# Altium PCB Z693_H93-B_KD01_V1.3.PcbDoc
Units mil, origin at the board's own origin, x right, y up, seen from the top; angles counter-clockwise.
Board outline 1912 x 1847.55 mil, 4 copper layers (Top Layer, MidLayer1, MidLayer2, Bottom Layer); 3 components, 103 nets, 2 pads, 4 vias.
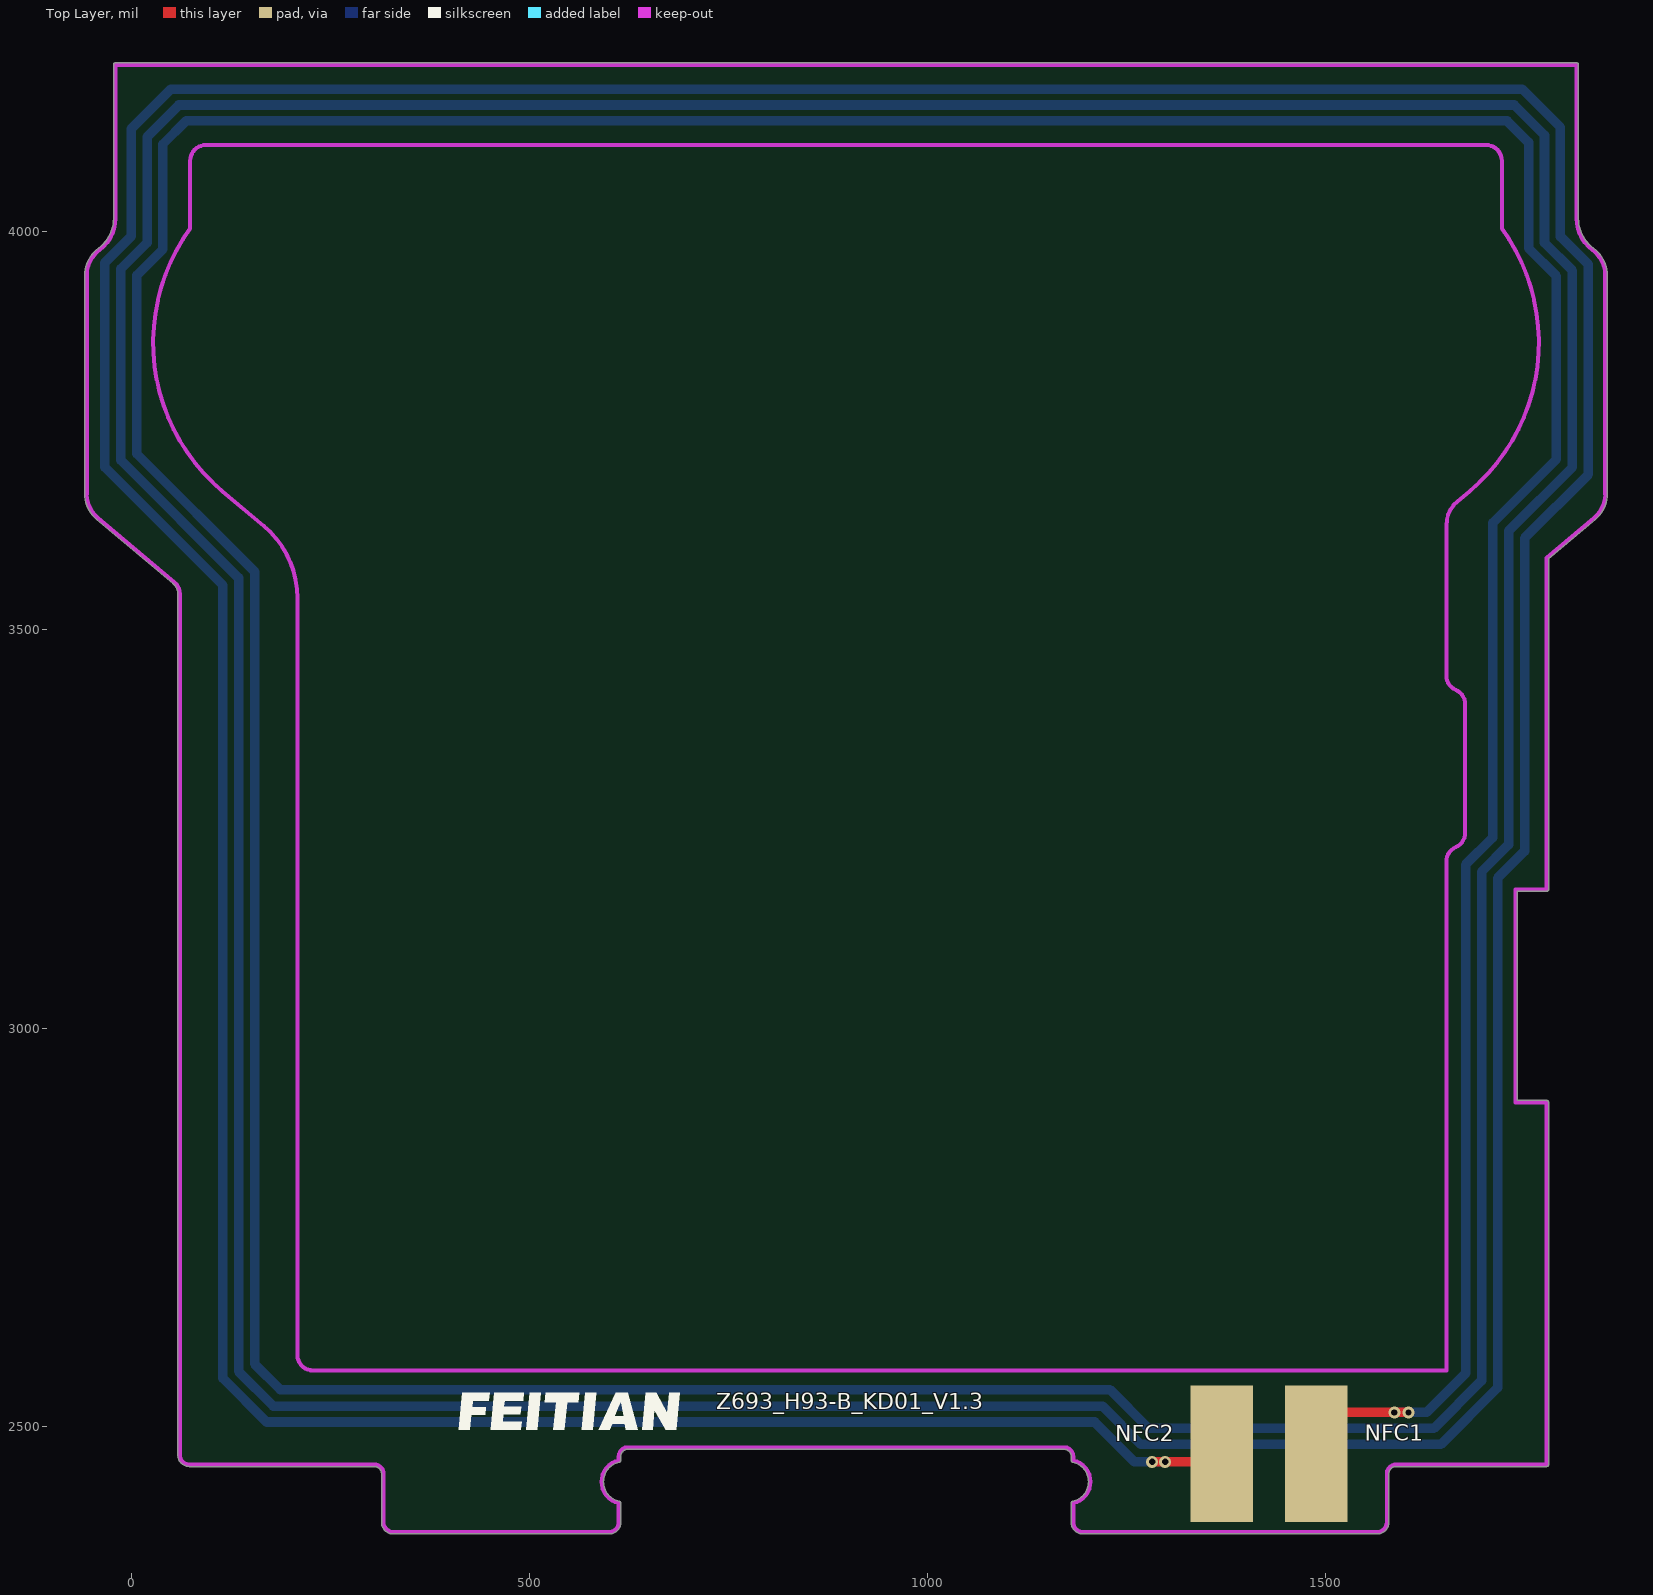
[diagram p0: Top Layer view]
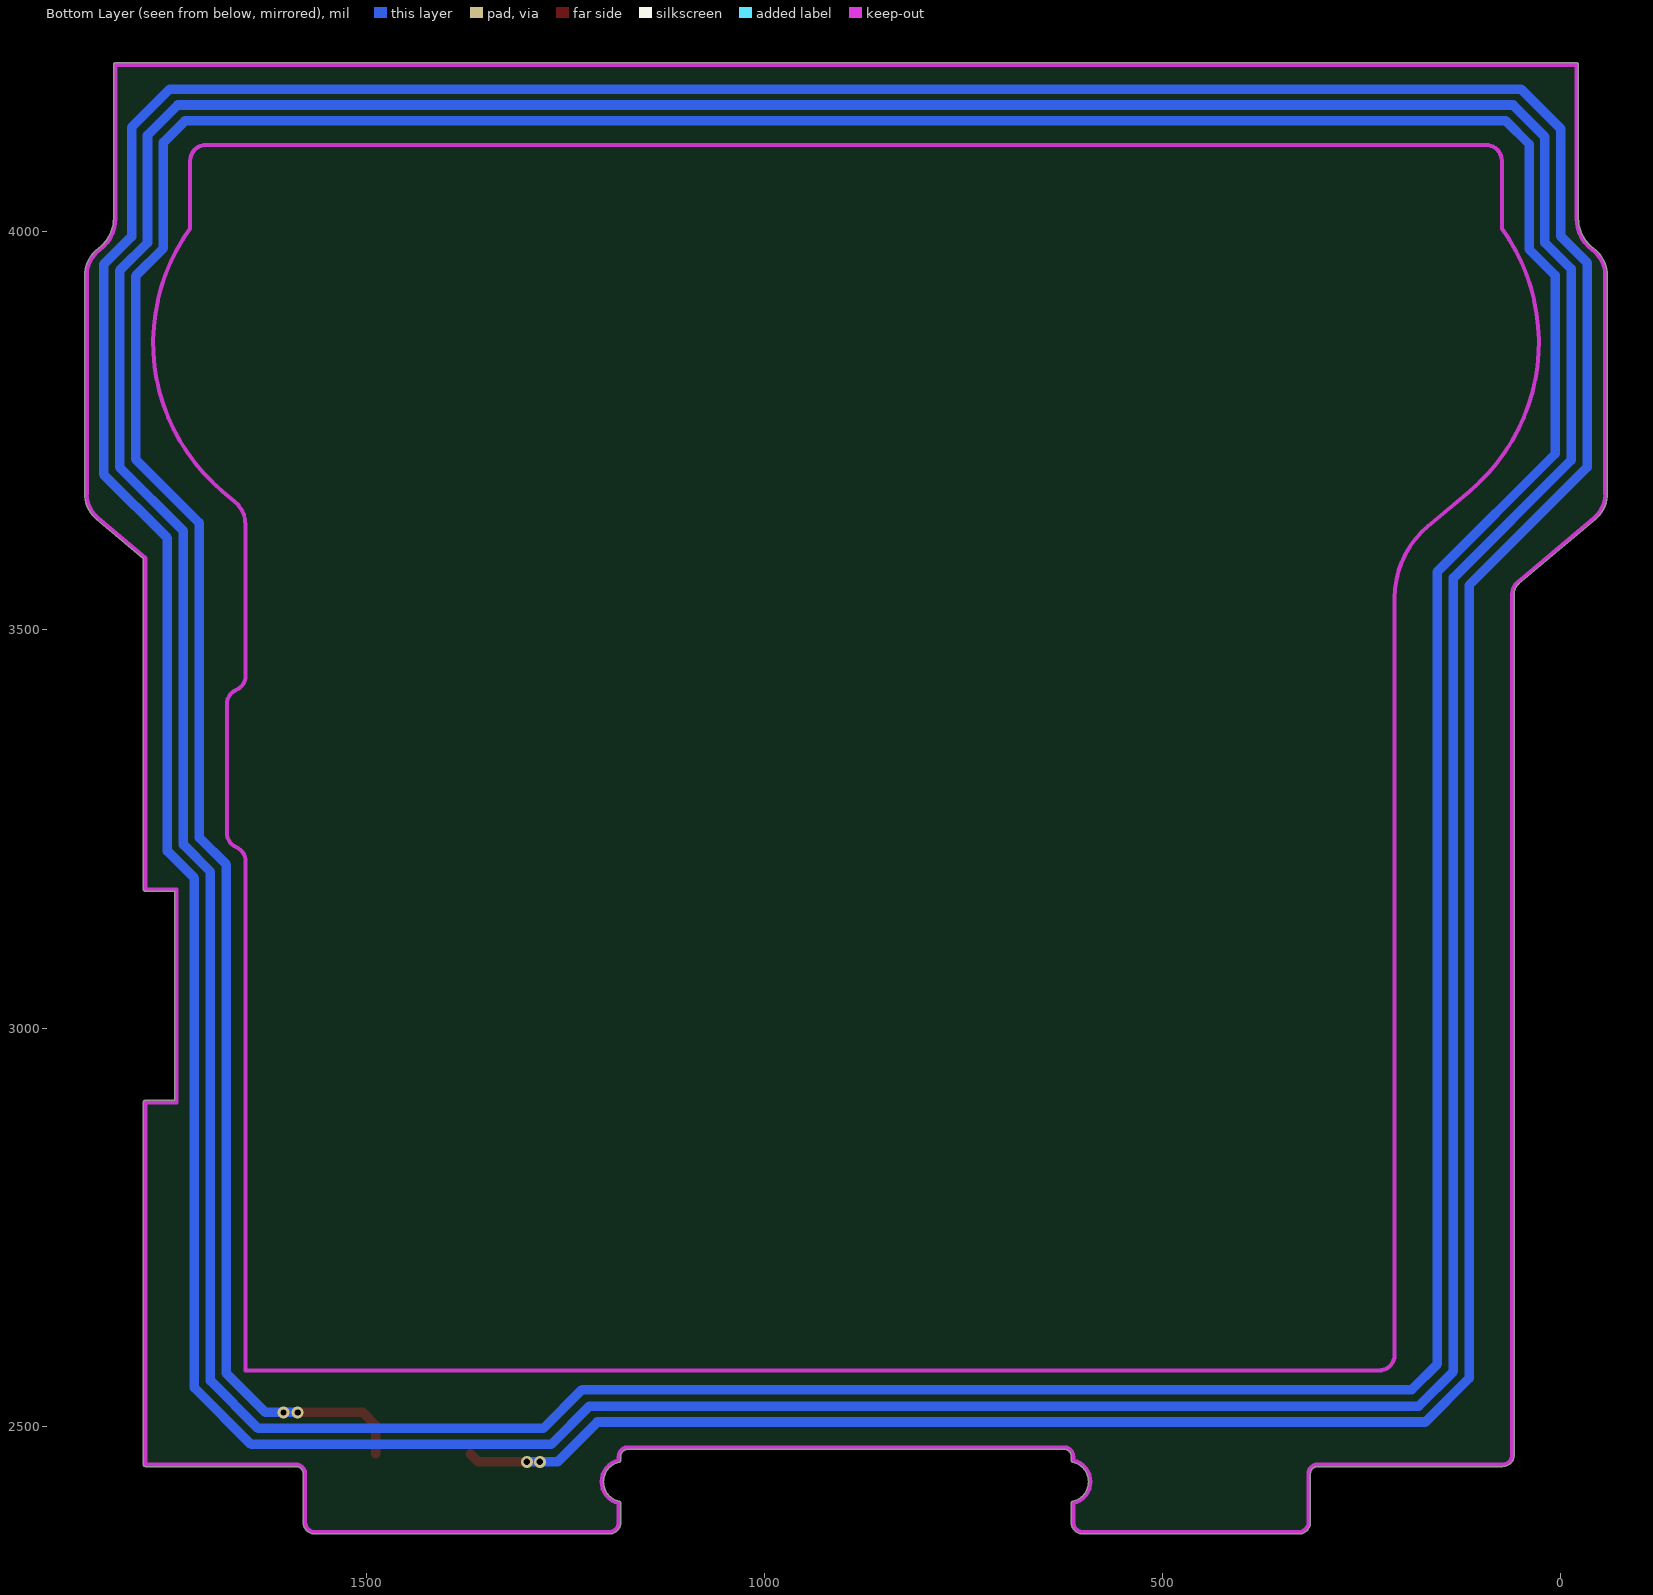
[diagram p1: Bottom Layer view, seen from below]

## Layer stack, top to bottom
Top Layer: signal copper 1.4
Dielectric: core 12.6, FR-4, Dk 4.8
MidLayer1: signal copper 1.4
Dielectric: prepreg 12.6, FR-4, Dk 4.8
MidLayer2: signal copper 1.4
Dielectric: core 12.6, FR-4, Dk 4.8
Bottom Layer: signal copper 1.4

## Board outline
314.45,2379.12 314.45,2440.14 ccw(c305.16,2440.14) 305.16,2449.44 cw(c305.16,2451.96) 305.14,2449.44 72.87,2449.44 cw(c72.87,2463.77) 58.55,2463.77 58.55,3545.18 cw(c61.06,3545.18) 58.55,3545.2 cw(c41.38,3545.18) 58.55,3545.18 58.55,3545.2 ccw(c41.38,3545.18) 52.43,3558.32 cw(c54.03,3560.26) 52.42,3558.33 52.42,3558.34 -43.36,3638.7 cw(c-16.44,3670.79) -58.32,3670.79 -58.32,3945.51 cw(c-16.44,3945.51) -41.22,3979.27 cw(c-39.74,3977.25) -41.21,3979.29 ccw(c-68.86,4016.92) -22.16,4016.92 -22.16,4209.83 cw(c-19.65,4209.83) -19.65,4212.35 1815,4212.35 cw(c1815,4209.83) 1817.52,4209.83 1817.52,4016.92 ccw(c1864.21,4016.92) 1836.56,3979.29 ccw(c1864.21,4016.92) 1836.58,3979.27 ccw(c1835.09,3977.25) 1836.56,3979.29 1836.58,3979.27 cw(c1811.79,3945.51) 1853.68,3945.51 1853.68,3670.79 cw(c1811.79,3670.79) 1838.72,3638.7 1780.11,3589.53 1780.11,3174.4 cw(c1777.6,3174.4) 1777.6,3171.88 1740.74,3171.88 1740.74,2909.2 1777.6,2909.2 cw(c1777.6,2906.68) 1780.11,2906.68 1780.11,2451.96 cw(c1777.6,2451.96) 1777.6,2449.44 1588.62,2449.44 ccw(c1588.62,2451.96) 1588.65,2449.44 1588.62,2449.44 ccw(c1588.62,2440.14) 1579.33,2440.14 1579.33,2379.12 cw(c1565,2379.12) 1565.03,2364.8 cw(c1565,2379.12) 1565,2364.8 1194.92,2364.8 cw(c1194.92,2367.31) 1194.9,2364.8 ccw(c1194.92,2379.12) 1194.92,2364.8 1194.9,2364.8 cw(c1194.92,2379.12) 1180.6,2379.12 1180.6,2403.38 cw(c1183.11,2403.38) 1182.59,2405.84 ccw(c1177.21,2430.3) 1202.25,2430.3 ccw(c1177.21,2430.3) 1182.59,2454.76 ccw(c1177.21,2430.3) 1182.57,2454.76 1182.59,2454.76 cw(c1183.11,2457.22) 1180.6,2457.22 1180.6,2461.8 ccw(c1183.11,2461.8) 1180.6,2461.78 1180.6,2461.8 ccw(c1171.3,2461.8) 1171.3,2471.09 624.06,2471.09 ccw(c624.06,2461.8) 614.76,2461.8 614.76,2457.22 cw(c612.24,2457.22) 612.76,2454.76 cw(c618.15,2430.3) 612.78,2454.76 612.76,2454.76 ccw(c618.15,2430.3) 612.76,2405.84 cw(c612.24,2403.38) 614.76,2403.38 614.76,2379.12 cw(c600.43,2379.12) 600.46,2364.8 cw(c600.43,2379.12) 600.43,2364.8 328.78,2364.8 cw(c328.78,2379.12) 328.76,2364.8 cw(c328.78,2379.12)

## Design rules (kind name [scope] priority, off if disabled: settings)
Clearance Clearance_1 [InPolygon] p1: gap=12
Clearance [All] p2: gap=6
HoleToHoleClearance [All] p1: gap=0 allowstackedmicrovias=TRUE
MinimumSolderMaskSliver [All] p1: minsoldermaskwidth=0
PolygonConnect PolygonConnect_1 [isvia] p1: connectstyle=Direct reliefconductorwidth=10 reliefentries=4 polygonreliefangle="90 Angle"
PolygonConnect [All] p2: connectstyle=Relief reliefconductorwidth=10 reliefentries=4 polygonreliefangle="90 Angle"
RoutingVias [All] p1: holewidth=4 width=25 viastyle="Through Hole" minholewidth=4 minwidth=8 maxholewidth=28 maxwidth=50
SilkToSilkClearance [All] p1: silktosilkclearance=0
SilkscreenOverComponentPads [All] p1: minsilkscreentomaskgap=0
SolderMaskExpansion [All] p1: expansion=4
Width [All] p1: maxlimit=150 minlimit=6 preferedwidth=10
24 further rules are at their usual default settings.

## Components (designator, comment, footprint, x,y, rotation, side; value= is the part's Value field where it differs from the comment)
NFC1 "" FT_TEST_1 1488.41,2465.32 r180 top (schematic designator 4)
NFC2 "" FT_TEST_1 1369.41,2465.32 r0 top (schematic designator 5)
Z693_H93-B_KD01_V1.3 "Z693_H93-B_KD01_V1.3" FT_LOGO_300_Y 401.41,2465.88 r0 top (schematic designator Z693_H93_KC06_V1.2)

## Footprints (in the part's own frame and the unit in brackets; to place one, negate y for a bottom-side part, rotate by r counter-clockwise, add the part's x,y. Pads: shape width x height; smd on the part's side, far side on the other; paste and mask are expansions set on the pad)
FT_LOGO_300_Y [mil]
  silkscreen extent 10,30 288,76
FT_TEST_1 [mm]
  rect 2x4.35 smd: 1(0,0)

## Part data
NFC1 NFC2: library part JC-1, "JC-2"
Z693_H93-B_KD01_V1.3: library part LOGO

## Via types
v1: diameter 15, hole 8, Top Layer to Bottom Layer, tented both sides, 4 vias

## Nets (pads, with @x,y where several pads share a name; then routed paths per layer and width w, separated by ;. In a path a pad name is that pad's centre, name@x,y a point inside that pad or via, vN(x,y) a via of type N, cw(c..) or ccw(c..) an arc to the next point about the centre after c; other vN are vias at no path point)
3V3: 
3V3_HS: 
AN0: 
ANT: 
BOOT0: 
BOOT1: 
CC1: 
CHR_CHK: 
COM_BUS: 
DEC1: 
GND: 
GP0: 
GP3: 
HS_POWER_EN: 
I2C1_SCL: 
I2C1_SDA: 
I2C_SCL: 
I2C_SCL_B: 
I2C_SDA: 
I2C_SDA_B: 
KEY-DN: 
KEY-OK: 
KEY-UP: 
LCD_D/C: 
LCD_RESET: 
MCU_EN: 
MOD_CTL: 
NetBattery_1: 
NetC4_2: 
NetC5_1: 
NetC7_2: 
NetC8_2: 
NetC10_2: 
NetC19_2: 
NetC20_1: 
NetC28_1: 
NetC29_1: 
NetC32_2: 
NetC39_1: 
NetC41_2: 
NetC44_1: 
NetC47_1: 
NetC48_1: 
NetD4_2: 
NetD5_2: 
NetD7_1: 
NetL1_2: 
NetL2_2: 
NetL4_1: 
NetOLED1_10: 
NetQ1_2: 
NetQ3_1: 
NetQ3_3: 
NetQ4_1: 
NetQ5_1: 
NetQ6_1: 
NetQ7_1: 
NetQ8_1: 
NetQ9_1: 
NetQ10_1: 
NetR1_2: 
NetR8_2: 
NetR9_1: 
NetR11_1: 
NetR13_1: 
NetR17_2: 
NetR18_2: 
NetR27_1: 
NetR32_2: 
NetR37_1: 
NetR54_1: 
NetR55_1: 
NFC_IN: 
NFC_VCC: 
NRF_POWER_EN: 
NRST: 
PWR_KEY: 
RESET: 
RF-1: 
SPI1_MISO: 
SPI1_MOSI: 
SPI1_NSS: 
SPI1_SCK: 
SWCLK: 
SWCLK_ST1: 
SWDCLK_ST: 
SWDIO: 
SWDIO_ST: 
SWDIO_ST1: 
UART1_RX: 
UART1_TX: 
USB_D+: 
USB_D-: 
USB_INS: 
USB_VBUS: 
VCC_5V: 
VCC_12.5V: 
VCC_RCBAT: 
VDD_NRF: 
XC1: 
XC2: 
XL1: 
XL2: 
pads on no net: NFC1.1 NFC2.1
copper on no net: | length 19949.9
  Top Layer w12: v1(1282.17,2455.32) 1359.41,2455.32 1369.41,2465.32 ; 1488.41,2465.32 1488.41,2501.32 1504.41,2517.32 v1(1604.17,2517.32)
  Bottom Layer w12: v1(1298.41,2455.32) 1259.86,2455.32 1209.86,2505.32 169.97,2505.32 114.92,2560.36 114.92,3556.36 -33.08,3704.36 -33.08,3961.39 -0.08,3994.39 -0.08,4129.39 49.85,4179.32 1746.97,4179.32 1794.92,4131.36 1794.92,3994.18 1829.92,3959.18 1829.92,3695.39 1749.92,3615.39 1749.92,3222.39 1715.92,3188.39 1715.92,2548.39 1644.85,2477.32 1267.86,2477.32 1219.86,2525.32 178.41,2525.32 134.92,2568.8 134.92,3565.32 -13.08,3713.32 -13.08,3953.32 19.92,3986.32 19.92,4119.32 59.92,4159.32 1736.92,4159.32 1774.92,4121.32 1774.92,3986.36 1809.92,3951.36 1809.92,3704.32 1729.92,3624.32 1729.92,3230.39 1695.92,3196.39 1695.92,2557.32 1635.92,2497.32 1277.86,2497.32 1229.11,2546.06 187.23,2546.06 154.92,2578.36 154.92,3573.36 6.92,3721.36 6.92,3945.39 39.57,3978.04 39.57,4110.04 68.85,4139.32 1727.97,4139.32 1754.92,4112.36 1754.92,3979.36 1789.92,3944.36 1789.92,3714.39 1709.92,3634.39 1709.92,3239.39 1675.92,3205.39 1675.92,2566.39 1626.85,2517.32 v1(1586.41,2517.32)

## Keep-outs
Keep-Out Layer:
  lines w5: -55.81,3670.79 ccw(c-16.44,3670.79) -41.75,3640.63 ; -55.81,3670.79 ccw(c-16.44,3670.79) -41.75,3640.63 ; -55.81,3670.79 -55.81,3945.51 ; -55.81,3670.79 -55.81,3945.51 ; -55.81,3945.51 cw(c-16.44,3945.51) -39.74,3977.25 ; -55.81,3945.51 cw(c-16.44,3945.51) -39.74,3977.25 ; -41.75,3640.63 54.03,3560.26 ; -41.75,3640.63 54.03,3560.26 ; -39.74,3977.25 ccw(c-68.86,4016.92) -19.65,4016.92 ; -39.74,3977.25 ccw(c-68.86,4016.92) -19.65,4016.92 ; -19.65,4016.92 -19.65,4209.83 ; -19.65,4016.92 -19.65,4209.83 ; -19.65,4209.83 1815,4209.83 ; -19.65,4209.83 1815,4209.83 ; 54.03,3560.26 cw(c41.38,3545.18) 61.06,3545.18 ; 54.03,3560.26 cw(c41.38,3545.18) 61.06,3545.18 ; 61.06,2463.77 ccw(c72.87,2463.77) 72.87,2451.96 ; 61.06,2463.77 ccw(c72.87,2463.77) 72.87,2451.96 ; 61.06,2463.77 61.06,3545.18 ; 61.06,2463.77 61.06,3545.18 ; 72.87,2451.96 305.16,2451.96 ; 72.87,2451.96 305.16,2451.96 ; 74.11,4004.34 ccw(c271.69,3861.01) 114.79,3674.02 ; 74.11,4004.34 ccw(c271.69,3861.01) 114.79,3674.02 ; 74.11,4004.34 74.11,4089.36 ; 74.11,4004.34 74.11,4089.36 ; 74.11,4089.36 cw(c93.8,4089.36) 93.8,4109.04 ; 74.11,4089.36 cw(c93.8,4089.36) 93.8,4109.04 ; 93.8,4109.04 1701.56,4109.04 ; 93.8,4109.04 1701.56,4109.04 ; 114.79,3674.02 166.51,3630.63 ; 114.79,3674.02 166.51,3630.63 ; 166.51,3630.63 cw(c90.59,3540.15) 208.7,3540.15 ; 166.51,3630.63 cw(c90.59,3540.15) 208.7,3540.15 ; 208.7,2589.75 ccw(c228.39,2589.75) 228.39,2570.07 ; 208.7,2589.75 ccw(c228.39,2589.75) 228.39,2570.07 ; 208.7,2589.75 208.7,3540.15 ; 208.7,2589.75 208.7,3540.15 ; 228.39,2570.07 1651.62,2570.07 ; 228.39,2570.07 1651.62,2570.07 ; 305.16,2451.96 cw(c305.16,2440.14) 316.97,2440.14 ; 305.16,2451.96 cw(c305.16,2440.14) 316.97,2440.14 ; 316.97,2379.12 ccw(c328.78,2379.12) 328.78,2367.31 ; 316.97,2379.12 ccw(c328.78,2379.12) 328.78,2367.31 ; 316.97,2379.12 316.97,2440.14 ; 316.97,2379.12 316.97,2440.14 ; 328.78,2367.31 600.43,2367.31 ; 328.78,2367.31 600.43,2367.31 ; 328.78,2367.31 600.43,2367.31 ; 328.78,2367.31 600.43,2367.31 ; 600.43,2367.31 ccw(c600.43,2379.12) 612.24,2379.12 ; 600.43,2367.31 ccw(c600.43,2379.12) 612.24,2379.12 ; 612.24,2379.12 612.24,2403.38 ; 612.24,2379.12 612.24,2403.38 ; 612.24,2403.38 cw(c618.15,2430.3) 612.24,2457.22 ; 612.24,2403.38 cw(c618.15,2430.3) 612.24,2457.22 ; 612.24,2457.22 612.24,2461.8 ; 612.24,2457.22 612.24,2461.8 ; 612.24,2461.8 cw(c624.06,2461.8) 624.06,2473.61 ; 612.24,2461.8 cw(c624.06,2461.8) 624.06,2473.61 ; 624.06,2473.61 1171.3,2473.61 ; 624.06,2473.61 1171.3,2473.61 ; 1171.3,2473.61 cw(c1171.3,2461.8) 1183.11,2461.8 ; 1171.3,2473.61 cw(c1171.3,2461.8) 1183.11,2461.8 ; 1183.11,2379.12 ccw(c1194.92,2379.12) 1194.92,2367.31 ; 1183.11,2379.12 ccw(c1194.92,2379.12) 1194.92,2367.31 ; 1183.11,2379.12 1183.11,2403.38 ; 1183.11,2379.12 1183.11,2403.38 ; 1183.11,2403.38 ccw(c1177.21,2430.3) 1183.11,2457.22 ; 1183.11,2403.38 ccw(c1177.21,2430.3) 1183.11,2457.22 ; 1183.11,2457.22 1183.11,2461.8 ; 1183.11,2457.22 1183.11,2461.8 ; 1194.92,2367.31 1565,2367.31 ; 1194.92,2367.31 1565,2367.31 ; 1565,2367.31 ccw(c1565,2379.12) 1576.81,2379.12 ; 1565,2367.31 ccw(c1565,2379.12) 1576.81,2379.12 ; 1576.81,2379.12 1576.81,2440.14 ; 1576.81,2379.12 1576.81,2440.14 ; 1576.81,2440.14 cw(c1588.62,2440.14) 1588.62,2451.96 ; 1576.81,2440.14 cw(c1588.62,2440.14) 1588.62,2451.96 ; 1588.62,2451.96 1777.6,2451.96 ; 1588.62,2451.96 1777.6,2451.96 ; 1651.62,2570.07 1651.62,3209.18 ; 1651.62,2570.07 1651.62,3209.18 ; 1651.62,3209.18 cw(c1671.3,3209.18) 1663.43,3227.22 ; 1651.62,3209.18 cw(c1671.3,3209.18) 1663.43,3227.22 ; 1651.62,3442.76 ccw(c1671.3,3442.76) 1663.43,3424.72 ; 1651.62,3442.76 ccw(c1671.3,3442.76) 1663.43,3424.72 ; 1651.62,3442.76 1651.62,3631.38 ; 1651.62,3442.76 1651.62,3631.38 ; 1651.62,3631.38 cw(c1690.99,3631.38) 1665.68,3661.53 ; 1651.62,3631.38 cw(c1690.99,3631.38) 1665.68,3661.53 ; 1663.43,3227.22 ccw(c1655.55,3245.26) 1675.24,3245.26 ; 1663.43,3227.22 ccw(c1655.55,3245.26) 1675.24,3245.26 ; 1663.43,3424.72 cw(c1655.55,3406.68) 1675.24,3406.68 ; 1663.43,3424.72 cw(c1655.55,3406.68) 1675.24,3406.68 ; 1665.68,3661.53 1680.56,3674.02 ; 1665.68,3661.53 1680.56,3674.02 ; 1675.24,3245.26 1675.24,3406.68 ; 1675.24,3245.26 1675.24,3406.68 ; 1680.56,3674.02 ccw(c1523.66,3861.01) 1721.24,4004.34 ; 1680.56,3674.02 ccw(c1523.66,3861.01) 1721.24,4004.34 ; 1701.56,4109.04 cw(c1701.56,4089.36) 1721.24,4089.36 ; 1701.56,4109.04 cw(c1701.56,4089.36) 1721.24,4089.36 ; 1721.24,4004.34 1721.24,4089.36 ; 1721.24,4004.34 1721.24,4089.36 ; 1738.23,2906.68 1777.6,2906.68 ; 1738.23,2906.68 1738.23,3174.4 ; 1738.23,2906.68 1777.6,2906.68 ; 1738.23,2906.68 1738.23,3174.4 ; 1738.23,3174.4 1777.6,3174.4 ; 1738.23,3174.4 1777.6,3174.4 ; 1777.6,2451.96 1777.6,2906.68 ; 1777.6,2451.96 1777.6,2906.68 ; 1777.6,3174.4 1777.6,3590.7 ; 1777.6,3174.4 1777.6,3590.7 ; 1777.6,3590.7 1837.1,3640.63 ; 1777.6,3590.7 1837.1,3640.63 ; 1815,4016.92 ccw(c1864.21,4016.92) 1835.09,3977.25 ; 1815,4016.92 ccw(c1864.21,4016.92) 1835.09,3977.25 ; 1815,4016.92 1815,4209.83 ; 1815,4016.92 1815,4209.83 ; 1835.09,3977.25 cw(c1811.79,3945.51) 1851.17,3945.51 ; 1835.09,3977.25 cw(c1811.79,3945.51) 1851.17,3945.51 ; 1837.1,3640.63 ccw(c1811.79,3670.79) 1851.17,3670.79 ; 1837.1,3640.63 ccw(c1811.79,3670.79) 1851.17,3670.79 ; 1851.17,3670.79 1851.17,3945.51 ; 1851.17,3670.79 1851.17,3945.51

## Silkscreen, mask and mechanical layers (free items; w line width, h text height)
Mechanical 2:
  lines w5: 1330.75,2379.12 1409.49,2379.12 1409.49,2550.38 1330.75,2550.38 1330.75,2379.12 ; 1448.86,2379.12 1527.6,2379.12 1527.6,2550.38 1448.86,2550.38 1448.86,2379.12
Mechanical 3:
  lines w5: 1187.05,2379.12 ccw(c1194.92,2379.12) 1194.92,2371.25 1565,2371.25 ccw(c1565,2379.12) 1572.88,2379.12 1572.88,2566.13 1187.05,2566.13 1187.05,2460.22 cw(c1177.21,2430.3) 1187.05,2400.38 1187.05,2379.12

## Dimensions
1815,4209.83 to 1565,2367.31 on Mechanical 2
-55.81,3945.51 to 1851.17,3945.51 on Mechanical 2